# Altium PCB v2.0_with_IO_Expander.PcbDoc
Units mm, origin at the board's own origin, x right, y up, seen from the top; angles counter-clockwise.
Board outline 75 x 73.5 mm, 2 copper layers (Top Layer, Bottom Layer), stack 1.569 mm thick; 55 components, 44 nets, 201 pads, 33 vias.
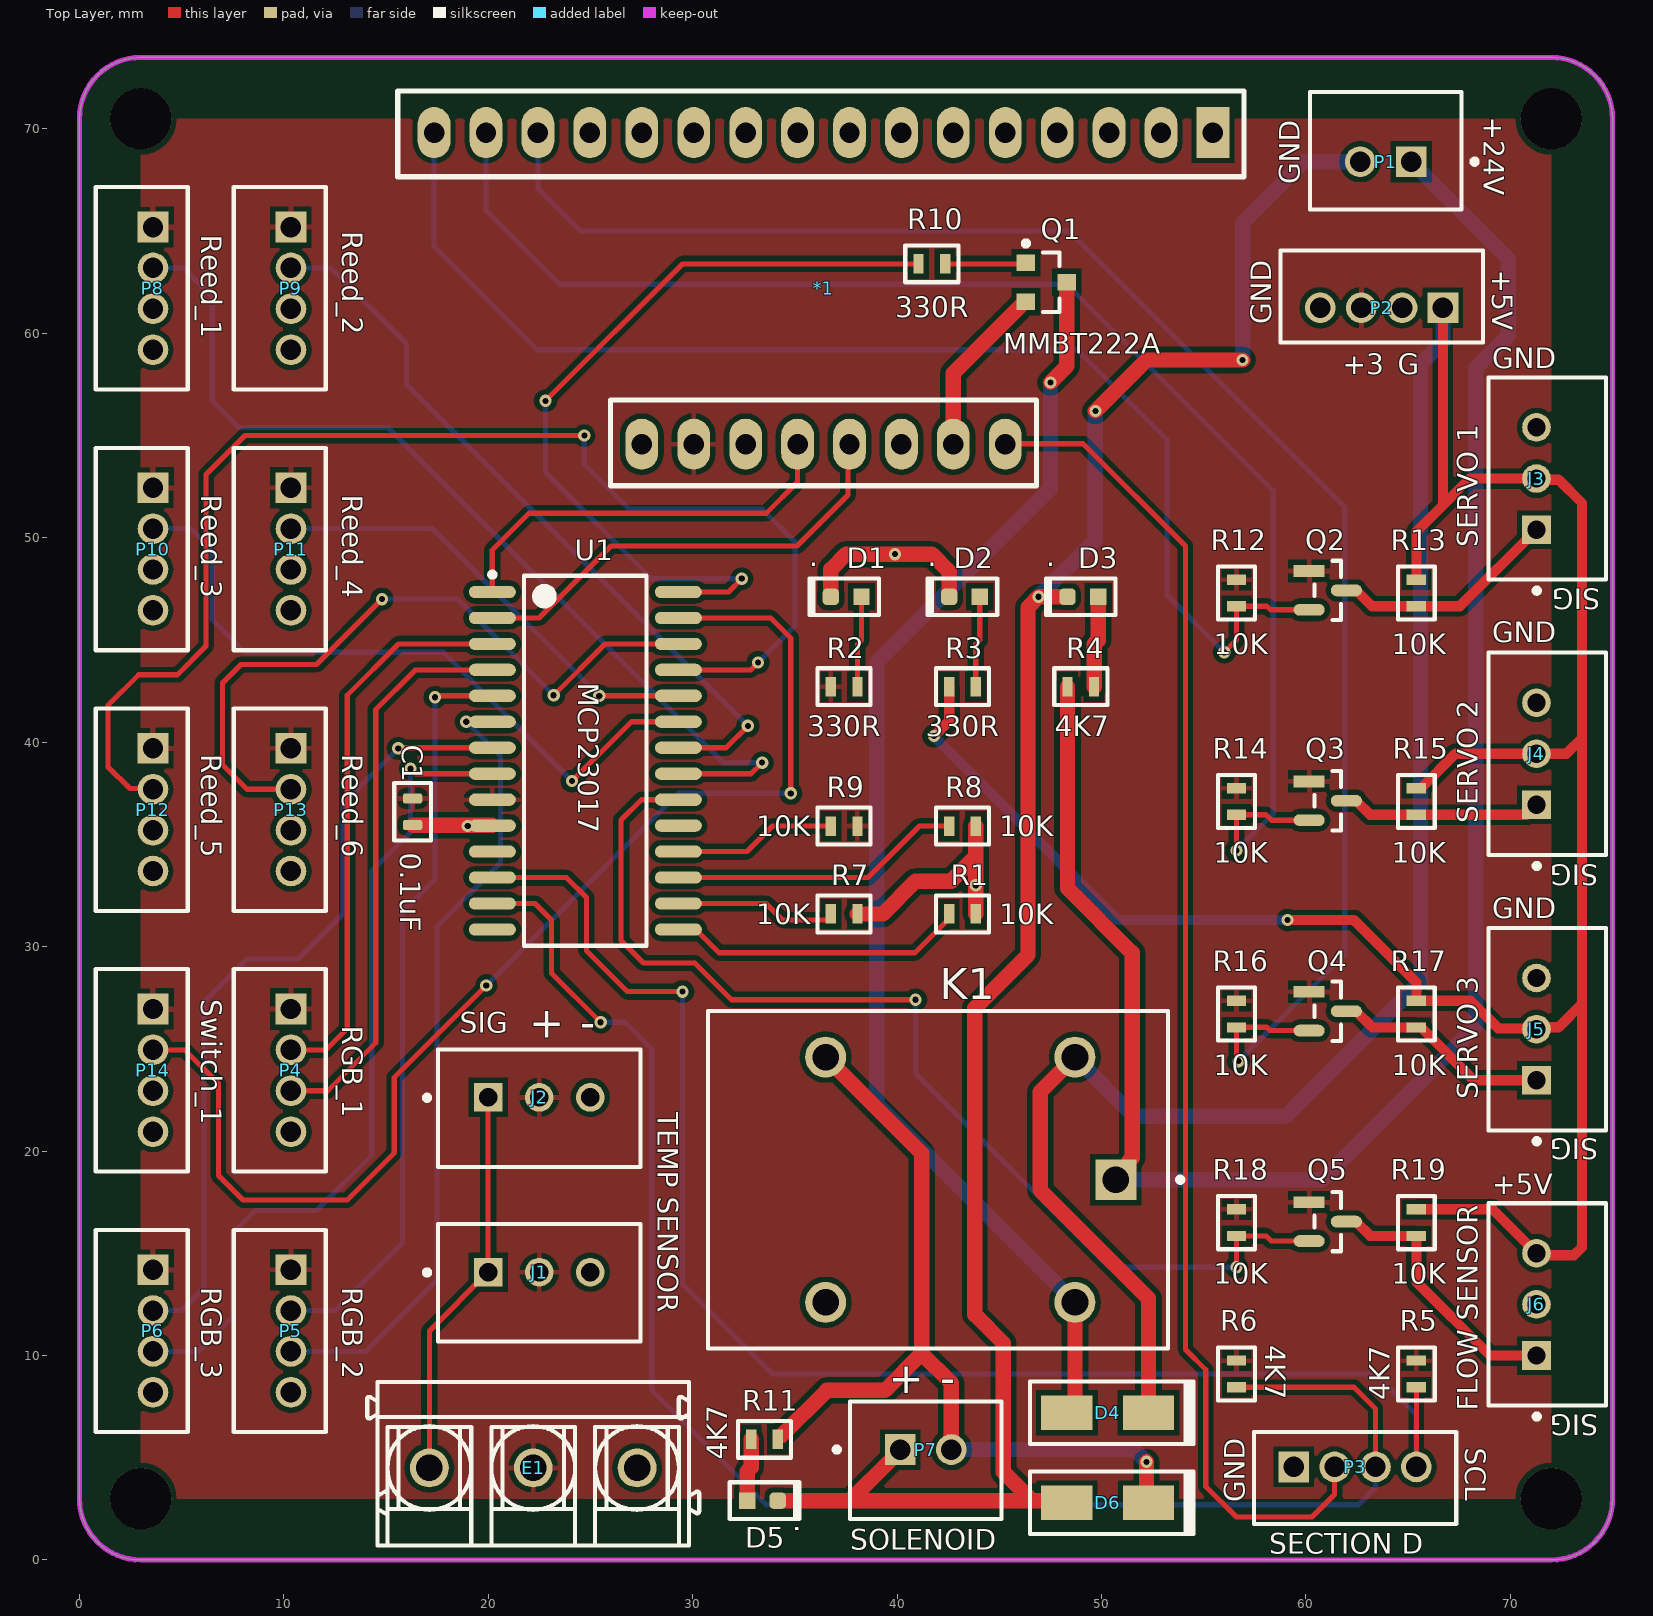
[diagram p0: Top Layer view]
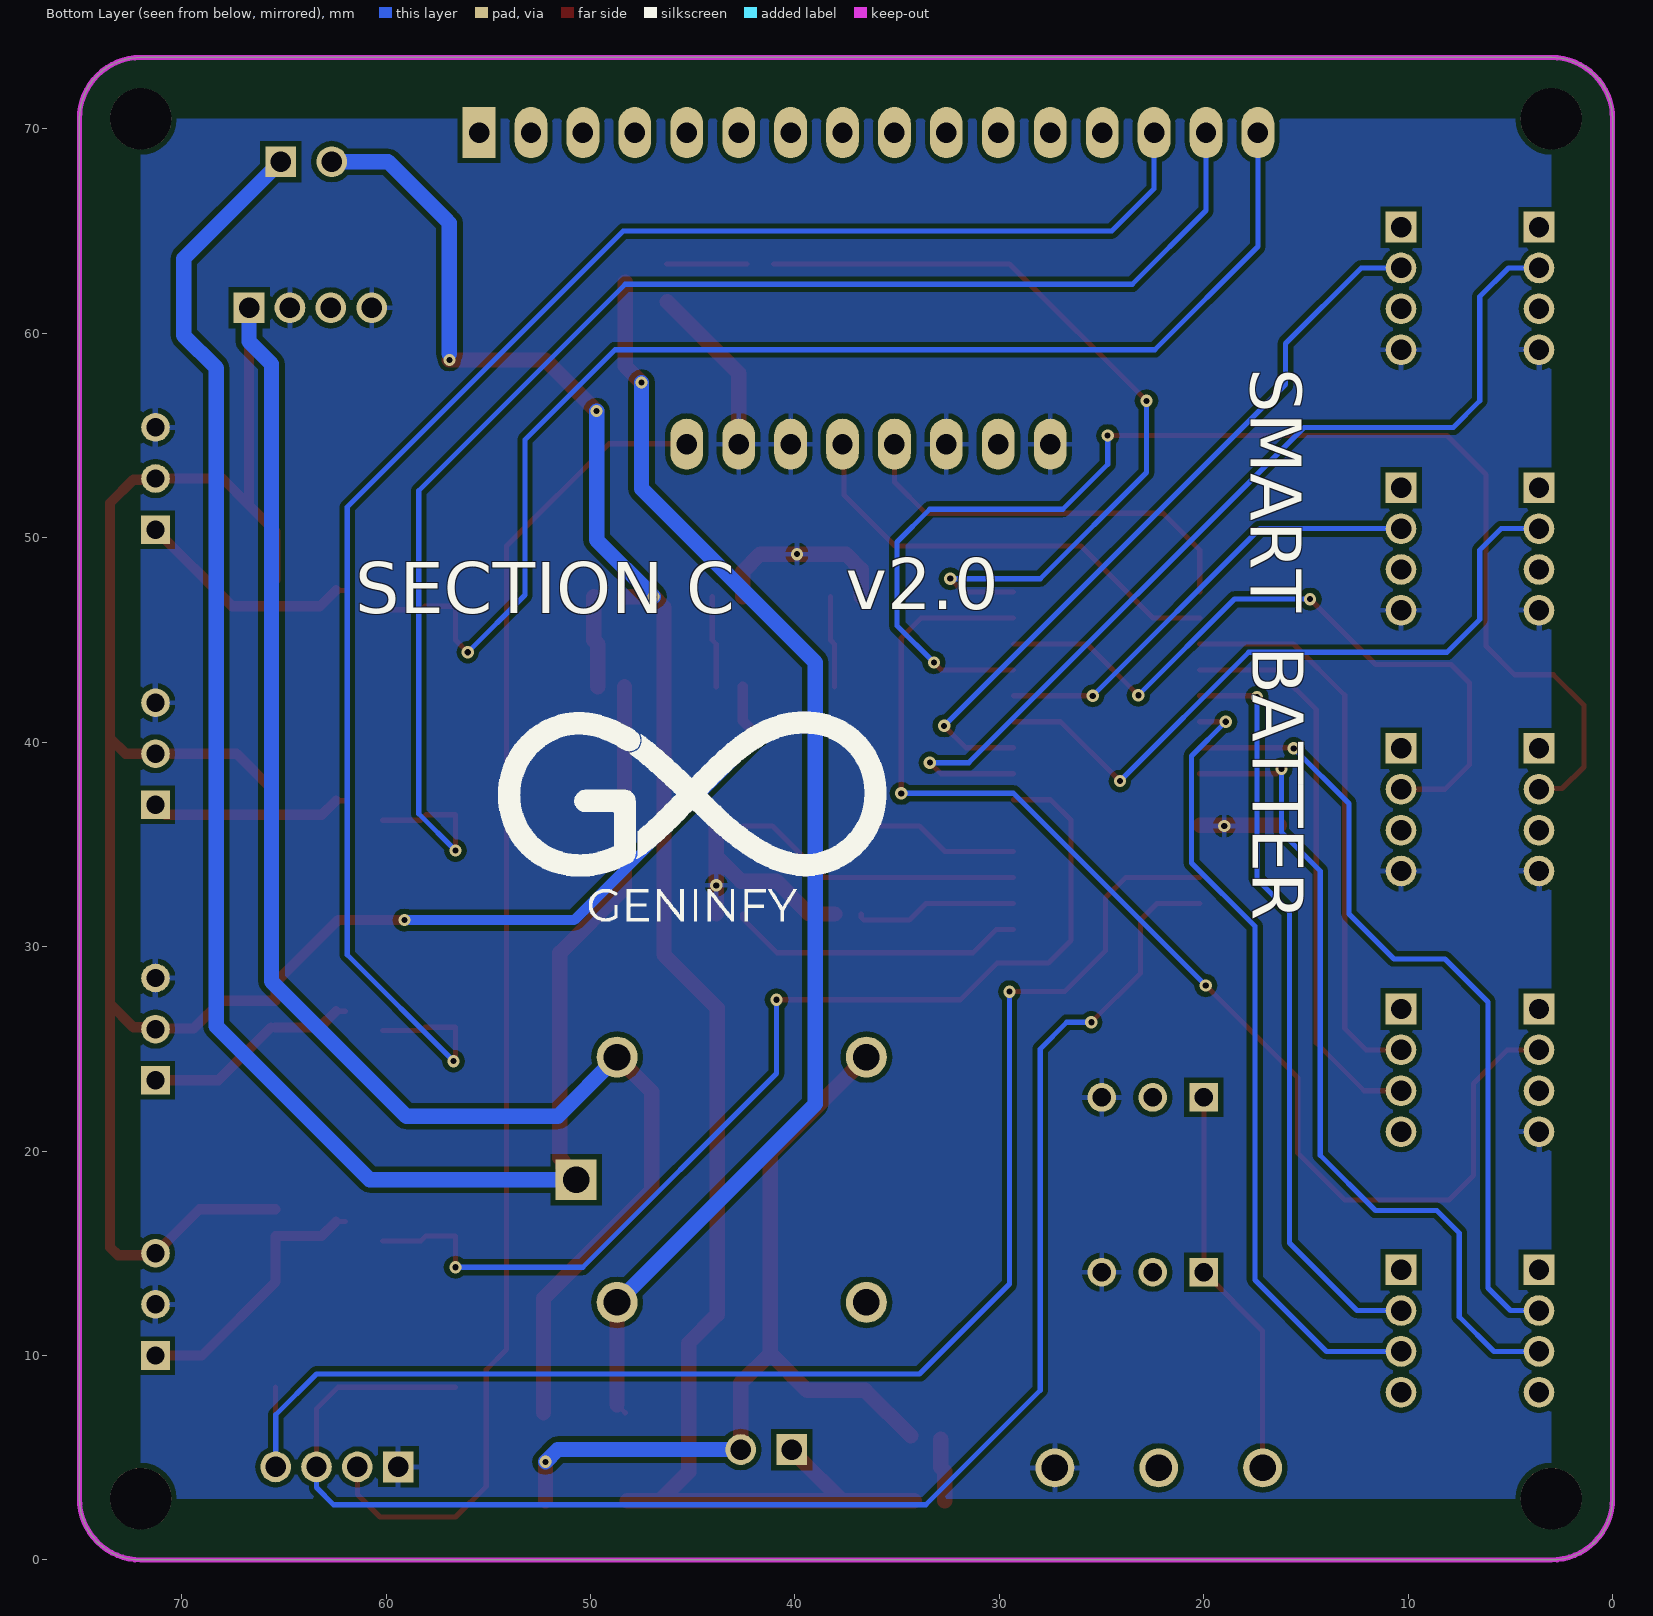
[diagram p1: Bottom Layer view, seen from below]
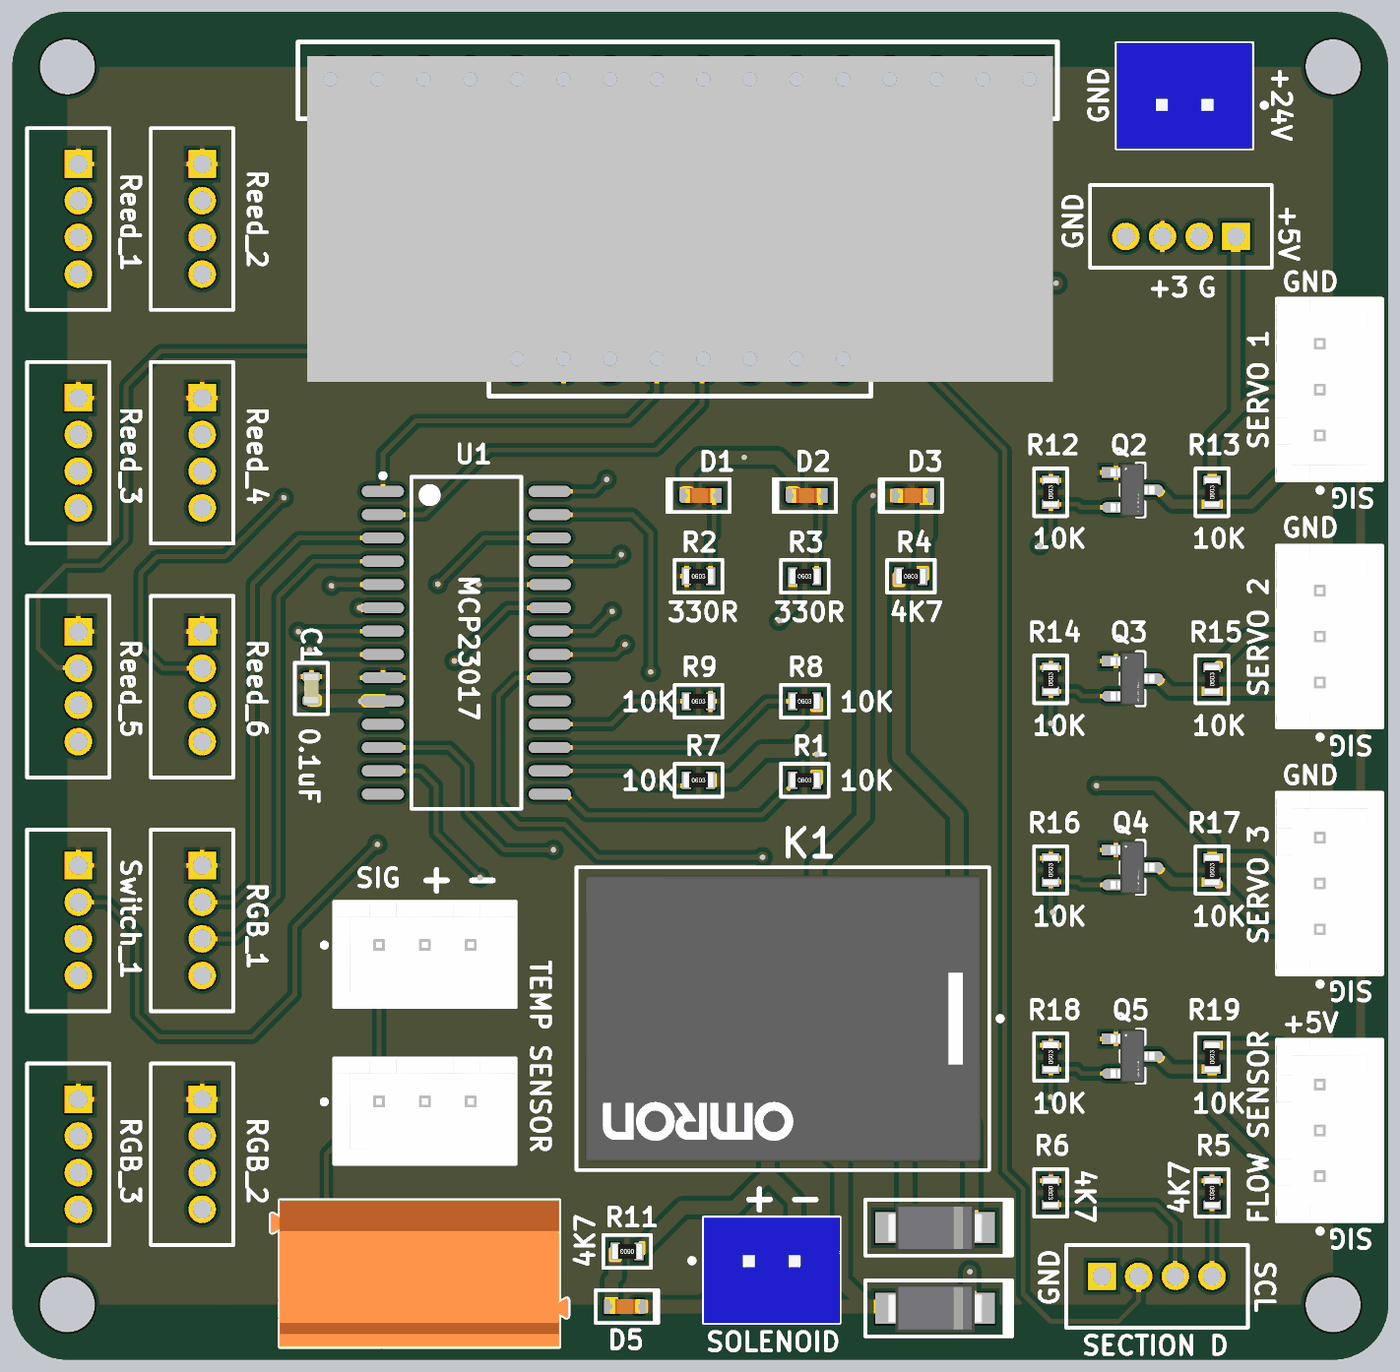
[diagram p2: 3D render of the assembled board from above, using the file's embedded part models]

## Layer stack, top to bottom
Top Solder: solder mask 0.0254, SM-001, Dk 4
Top Layer: signal copper 0.035
Dielectric 1: core 1.4986, Core-043, Dk 4.3
Bottom Layer: signal copper 0.035
Bottom Solder: solder mask 0.0254, SM-001, Dk 4

## Board outline
3,0 cw(c3,3) 0,3 0,70.5 cw(c3,70.5) 3,73.5 72,73.5 cw(c72,70.5) 75,70.5 75,3 cw(c72,3) 72,0

## Design rules (kind name [scope] priority, off if disabled: settings)
Clearance [All] p1: gap=0.254 ignorepadtopadclearanceinfootprint=FALSE except(0: Arc-Hole Track-Hole SMDPad-Hole THPad-Hole Via-Hole Fill-Hole Poly-Hole Region-Hole Text-Hole)
PolygonConnect [All] p1: connectstyle=Relief reliefconductorwidth=0.254 reliefentries=4 polygonreliefangle="90 Angle" airgapwidth=0.254
RoutingVias [All] p1: holewidth=0.711 width=1.27 viastyle="Through Hole" minholewidth=0.711 minwidth=1.27 maxholewidth=0.711 maxwidth=1.27
SolderMaskExpansion [All] p1: expansion=0.102 istentingtop=FALSE
Width [All] p1: maxlimit=1 minlimit=0.254 preferedwidth=0.254
30 further rules are at their usual default settings.

## Components (designator, comment, footprint, x,y, rotation, side; value= is the part's Value field where it differs from the comment)
*1 "CD74HC4067" "CD74HC4067 MODULE" 36.4,62.2 r270 top
C1 "0.1uF" "0.1uF 0603" 16.3,36.6 r270 top
D1 "LED - Orange" LED0603-Orange 37.507,47.118 r0 top
D2 "LED - Orange" LED0603-Orange 43.296,47.118 r0 top
D3 "LED - Orange" LED0603-Orange 49.086,47.118 r0 top
D4 "1N4007" "M7 1N4007 SMA" 50.3,7.2 r0 top
D5 "LED - Orange" LED0603-Orange 33.413,2.9 r180 top
D6 "1N4007" "M7 1N4007 SMA" 50.3,2.8 r0 top
E1 "1760500000" PM_5_08_90_03 22.2,4.7 r0 top
J1 "B3B-XH-A(LF)(SN)" FP-B3B-XH-A_LF_SN-MFG 22.492,13.553 r0 top
J2 "B3B-XH-A(LF)(SN)" FP-B3B-XH-A_LF_SN-MFG 22.492,22.1 r0 top
J3 "B3B-XH-A(LF)(SN)" FP-B3B-XH-A_LF_SN-MFG 71.8,52.9 r90 top
J4 "B3B-XH-A(LF)(SN)" FP-B3B-XH-A_LF_SN-MFG 71.8,39.433 r90 top
J5 "B3B-XH-A(LF)(SN)" FP-B3B-XH-A_LF_SN-MFG 71.8,25.967 r90 top
J6 "B3B-XH-A(LF)(SN)" FP-B3B-XH-A_LF_SN-MFG 71.8,12.5 r90 top
K1 "G5LE-14-DC5" FP-G5LE-14-DC5-MFG 42,18.6 r180 top
P1 "B2B-XH-A(LF)(SN)" JST-B2B-XH-A_V 63.9,68.4 r180 top
P2 "B4B-PH-K-S(LF)(SN)" JST-B4B-PH-K-S_V 63.7,61.8 r180 top
P3 "B4B-PH-K-S(LF)(SN)" JST-B4B-PH-K-S_V 62.4,4 r0 top
P4 "B4B-PH-K-S(LF)(SN)" JST-B4B-PH-K-S_V 9.8,23.95 r270 top
P5 "B4B-PH-K-S(LF)(SN)" JST-B4B-PH-K-S_V 9.8,11.2 r270 top
P6 "B4B-PH-K-S(LF)(SN)" JST-B4B-PH-K-S_V 3.05,11.2 r270 top
P7 "B2B-XH-A(LF)(SN)" JST-B2B-XH-A_V 41.4,5.4 r0 top
P8 "B4B-PH-K-S(LF)(SN)" JST-B4B-PH-K-S_V 3.05,62.2 r270 top
P9 "B4B-PH-K-S(LF)(SN)" JST-B4B-PH-K-S_V 9.8,62.2 r270 top
P10 "B4B-PH-K-S(LF)(SN)" JST-B4B-PH-K-S_V 3.05,49.45 r270 top
P11 "B4B-PH-K-S(LF)(SN)" JST-B4B-PH-K-S_V 9.8,49.45 r270 top
P12 "B4B-PH-K-S(LF)(SN)" JST-B4B-PH-K-S_V 3.05,36.7 r270 top
P13 "B4B-PH-K-S(LF)(SN)" JST-B4B-PH-K-S_V 9.8,36.7 r270 top
P14 "B4B-PH-K-S(LF)(SN)" JST-B4B-PH-K-S_V 3.05,23.95 r270 top
Q1 "MMBT2222ALT1G" ONSC-SOT-23-3-318-08_V 47.3,62.5 r0 top
Q2 "BSS138" FP-318-08-IPC_B 61.066,47.429 r0 top
Q3 "BSS138" FP-318-08-IPC_B 61.066,37.136 r0 top
Q4 "BSS138" FP-318-08-IPC_B 61.066,26.843 r0 top
Q5 "BSS138" FP-318-08-IPC_B 61.066,16.55 r0 top
R1 "10k" "10k R0603" 43.196,31.6 r0 top
R2 "68R" "68R 0603" 37.407,42.718 r0 top
R3 "68R" "68R 0603" 43.196,42.718 r0 top
R4 "68R" "68R 0603" 48.986,42.718 r0 top
R5 "10k" "10k R0603" 65.4,9.1 r270 top
R6 "10k" "10k R0603" 56.6,9.1 r270 top
R7 "10k" "10k R0603" 37.407,31.6 r0 top
R8 "10k" "10k R0603" 43.196,35.9 r0 top
R9 "10k" "10k R0603" 37.407,35.9 r0 top
R10 "68R" "68R 0603" 41.7,63.4 r180 top
R11 "68R" "68R 0603" 33.513,5.9 r180 top
R12 "10k" "10k R0603" 56.6,47.3 r90 top
R13 "10k" "10k R0603" 65.4,47.3 r90 top
R14 "10k" "10k R0603" 56.6,37.1 r90 top
R15 "10k" "10k R0603" 65.4,37.1 r90 top
R16 "10k" "10k R0603" 56.6,26.7 r90 top
R17 "10k" "10k R0603" 65.4,26.7 r90 top
R18 "10k" "10k R0603" 56.6,16.5 r90 top
R19 "10k" "10k R0603" 65.4,16.5 r90 top
U1 "MCP23017-E/SO" SOIC-SO28_N 24.75,39.095 r0 top

## Footprints (in the part's own frame and the unit in brackets; to place one, negate y for a bottom-side part, rotate by r counter-clockwise, add the part's x,y. Pads: shape width x height; smd on the part's side, far side on the other; paste and mask are expansions set on the pad)
"0.1uF 0603" [mm]
  rrect50% 0.5x0.95 smd: 1(-0.65,0) 2(0.65,0)
  silkscreen extent -1.4,-0.9 1.4,0.9, body extent -0.8,-0.4 0.8,0.4, height 0.8
"10k R0603" [mm]
  rect 0.5x0.95 smd: 1(-0.65,0) 2(0.65,0)
  silkscreen extent -1.3,-0.9 1.3,0.9, body extent -0.8,-0.4 0.8,0.4, height 0.45
"68R 0603" [mm]
  rect 0.5x0.95 smd: 1(-0.65,0) 2(0.65,0)
  silkscreen extent -1.3,-0.9 1.3,0.9, body extent -0.8,-0.4 0.8,0.4, height 0.45
"CD74HC4067 MODULE" [mm]
  oval 2.5x1.6 hole 1: C0(-7.62,-19.05) C1(-7.62,-16.51) C2(-7.62,-13.97) C3(-7.62,-11.43) C4(-7.62,-8.89) C5(-7.62,-6.35) C6(-7.62,-3.81) C7(-7.62,-1.27) C8(-7.62,1.27) C9(-7.62,3.81) C10(-7.62,6.35) C11(-7.62,8.89) C12(-7.62,11.43) C13(-7.62,13.97) C14(-7.62,16.51) EN(7.62,-3.81) GND(7.62,-8.89) S0(7.62,-1.27) S1(7.62,1.27) S2(7.62,3.81) S3(7.62,6.35) SIG(7.62,8.89) VCC(7.62,-6.35)
  rect 2.5x1.6 hole 1: C15(-7.62,19.05)
  silkscreen extent -9.65,-20.83 9.65,20.57, body extent -8.89,-20.32 8.89,20.32, height 11.35
FP-318-08-IPC_B [mm]
  rect 1.524x0.578 smd: 1(-0.91,0.95)
  rrect100% 1.524x0.578 smd: 2(-0.91,-0.95) 3(0.91,0)
  silkscreen extent -0.65,-1.45 0.65,1.45, body extent -1.92,-1.7 1.92,1.7, height 0.25
FP-B3B-XH-A_LF_SN-MFG [mm]
  rect 1.4x1.4 hole 0.9: 1(-2.5,0.525)
  round 1.4 hole 0.9: 2(0,0.525) 3(2.5,0.525)
  silkscreen extent -5.61,-2.88 4.95,2.88, body extent -5.05,-2.98 5.05,2.98, height 0.25
FP-G5LE-14-DC5-MFG [mm]
  rect 2x2 hole 1.3: 1(-8.7,0)
  round 2 hole 1.3: 2(-6.7,-6) 3(5.5,-6) 4(5.5,6) 5(-6.7,6)
  silkscreen extent -11.98,-8.25 11.25,8.25, body extent -11.35,-8.35 11.35,8.35, height 0.25
JST-B2B-XH-A_V [mm] "Header, 2-Leads, Body 7.4x5.75mm, Pitch 2.5mm"
  rect 1.5x1.5 hole 1: 1(-1.25,0)
  round 1.5 hole 1: 2(1.25,0)
  silkscreen extent -4.47,-3.4 3.7,2.35, body extent -3.7,-3.4 3.7,2.35, height 7
JST-B4B-PH-K-S_V [mm] "Connector, 4-Leads, Body 9.9x4.5mm, Pitch 2mm"
  rect 1.5x1.5 hole 1: 1(-3,0.55)
  round 1.5 hole 1: 2(-1,0.55) 3(1,0.55) 4(3,0.55)
  silkscreen extent -4.95,-2.25 4.95,2.25, body extent -4.95,-2.25 4.95,2.25, height 6
LED0603-Orange [mm]
  rrect50% 0.8x0.8 smd: 1(-0.75,0)
  rect 0.8x0.8 smd: 2(0.75,0)
  silkscreen extent -1.8,-0.9 1.6,1, body extent -0.8,-0.4 0.8,0.4, height 0.7
"M7 1N4007 SMA" [mm]
  rect 2.5x1.7 smd: 1(-2,0) 2(2,0)
  silkscreen extent -3.8,-1.6 4.2,1.52, body extent -2.6,-1.3 2.6,1.3, height 2.42
ONSC-SOT-23-3-318-08_V [mm] "SOT23, 3-Leads, Body 2.92x1.3mm, Pitch 0.95mm"
  rect 0.9x0.8 smd: 1(-1,0.95) 2(-1,-0.95) 3(1,0)
  silkscreen extent -1.12,-1.46 0.65,2.02, body extent -0.65,-1.46 0.65,1.46, height 1.11
PM_5_08_90_03 [mm] "PM 5.08/03/90 3.5"
  round 1.9 hole 1.3: A1(-5.08,-0.2) A2(0,-0.2) A3(5.08,-0.2)
  silkscreen extent -8.12,-4 8.12,4, body extent -8.12,-4 8.12,4, height 10.01
SOIC-SO28_N [mm] "SOIC, 28-Leads, Body 17.9x7.5mm, Pitch 1.27mm, IPC Medium Density"
  oval 2.3x0.6 smd: 1(-4.55,8.255) 2(-4.55,6.985) 3(-4.55,5.715) 4(-4.55,4.445) 5(-4.55,3.175) 6(-4.55,1.905) 7(-4.55,0.635) 8(-4.55,-0.635) 9(-4.55,-1.905) 10(-4.55,-3.175) 11(-4.55,-4.445) 12(-4.55,-5.715) 13(-4.55,-6.985) 14(-4.55,-8.255) 15(4.55,-8.255) 16(4.55,-6.985) 17(4.55,-5.715) 18(4.55,-4.445) 19(4.55,-3.175) 20(4.55,-1.905) 21(4.55,-0.635) 22(4.55,0.635) 23(4.55,1.905) 24(4.55,3.175) 25(4.55,4.445) 26(4.55,5.715) 27(4.55,6.985) 28(4.55,8.255)
  silkscreen extent -4.67,-9.05 3,9.23, body extent -3.8,-9.05 3.8,9.05, height 2.65

## Part data
C1: library part C0603C104M4RACTU, "CAP CER 0.1UF 16V X7R 0603", Capacitance=100nF, Case Code (Imperial)=0603, Case Code (Metric)=1608, Dielectric=X7R, Dielectric Material=Ceramic, Manufacturer=KEMET, Max Operating Temperature=125°C, Min Operating Temperature=-55°C, Package Quantity=1, Supplier Part Number 1=399-1099-1-ND, Tolerance=20%, Voltage Rating=16V, Case/Package=0603, Category="Ceramic Capacitors", ComponentLink1Description=https://datasheet.ciiva.com/18102/getdatasheetpartid-66190-18102310.pdf?src-supplier=Verical, ComponentLink1URL=https://datasheet.ciiva.com/18102/getdatasheetpartid-66190-18102310.pdf?src-supplier=Verical, ComponentLink2Description=https://datasheet.ciiva.com/7823/kem-c1002-x7r-smd-7823992.pdf?src-supplier=Element14, ComponentLink2URL=https://datasheet.ciiva.com/7823/kem-c1002-x7r-smd-7823992.pdf?src-supplier=Element14, ComponentLink3Description=https://datasheet.ciiva.com/7823/kem-c1002-x7r-smd-7823993.pdf?src-supplier=Element14, ComponentLink3URL=https://datasheet.ciiva.com/7823/kem-c1002-x7r-smd-7823993.pdf?src-supplier=Element14, ComponentLink4Description=https://datasheet.ciiva.com/14589/70095383-14589450.pdf?src-supplier=Allied+Electronics, ComponentLink4URL=https://datasheet.ciiva.com/14589/70095383-14589450.pdf?src-supplier=Allied+Electronics, ComponentLink5Description=https://datasheet.ciiva.com/18192/getdatasheetpartid-302288-18192716.pdf?src-supplier=Verical, ComponentLink5URL=https://datasheet.ciiva.com/18192/getdatasheetpartid-302288-18192716.pdf?src-supplier=Verical, Depth=0.8mm, Height=0.8mm, Lead Pitch=0.7mm, Length=1.6mm, Manufacturer Part Number=C0603C104M4RACTU, Mount="Surface Mount,PCB", Number of Pins=2, Packaging="Tape and Reel", Pricing 1="1=0.10000, 10=0.03100, 50=0.01720, 100=0.01400, 500=0.01002, 1000=0.00787 (USD)", Radiation Hardening=No, REACH SVHC="No SVHC", RoHS=Yes, Stock 1=114153, Supplier 1=Digi-Key, Termination=SMD/SMT, Thickness=0.034inch, Voltage Rating (DC)=16V, Width=0.031inch
D1 D2 D3 D5: library part LTST-C191KFKT, "LED ORANGE CLEAR SMD", Case Code (Imperial)=0603, Case Code (Metric)=1608, Color=Orange, Forward Current=30mA, Forward Voltage=2V, Lens Color=Colorless, Manufacturer="Vishay Lite-On", Max Operating Temperature=85°C, Min Operating Temperature=-55°C, Package Quantity=1, Power Dissipation=75mW, Reverse Voltage=5V, Supplier Part Number 1=160-1445-1-ND, Test Current=20mA, Case/Package=0603, Category=LEDs, ComponentLink1Description=https://datasheet.ciiva.com/2109/ltst-c191kfkt-2109968.pdf?src-supplier=Digi-Key, ComponentLink1URL=https://datasheet.ciiva.com/2109/ltst-c191kfkt-2109968.pdf?src-supplier=Digi-Key, ComponentLink2Description=https://datasheet.ciiva.com/12400/100-ltst-c191kfkt-39904-12400811.pdf?src-supplier=Mouser, ComponentLink2URL=https://datasheet.ciiva.com/12400/100-ltst-c191kfkt-39904-12400811.pdf?src-supplier=Mouser, ComponentLink3Description=https://datasheet.ciiva.com/11775/0900766b80dc02b0-11775613.pdf?src-supplier=RSComponents, ComponentLink3URL=https://datasheet.ciiva.com/11775/0900766b80dc02b0-11775613.pdf?src-supplier=RSComponents, ComponentLink4Description=https://datasheet.ciiva.com/15201/getdatasheetpartid-631075-15201391.pdf?src-supplier=Verical, ComponentLink4URL=https://datasheet.ciiva.com/15201/getdatasheetpartid-631075-15201391.pdf?src-supplier=Verical, ComponentLink5Description=https://datasheet.ciiva.com/2109/s-110-ltst-c191kfkt-2109969.pdf?src-supplier=Digi-Key, ComponentLink5URL=https://datasheet.ciiva.com/2109/s-110-ltst-c191kfkt-2109969.pdf?src-supplier=Digi-Key, Depth=0.8mm, Dominant Wavelength=605nm, Height=0.55mm, Illumination Color=Orange, Lead Free="Lead Free", Length=1.6mm, Lens Style=Diffused,Colorless,Rectangular, Lens Transparency=Clear, Luminous Intensity=90mcd, Manufacturer Part Number=LTST-C191KFKT, Mount="Surface Mount", Number of Elements=1, Number of LEDs=1, Number of Pins=2, Packaging="Tape and Reel", Power Rating=75mW, Pricing 1="1=0.24000, 10=0.17900, 100=0.08460, 500=0.05640, 1000=0.04418, 2500=0.04324 (USD)", Radiation Hardening=No, RoHS=Yes, Stock 1=92562, Supplier 1=Digi-Key, Viewing Angle=130°, Wavelength=611nm, Width=0.8mm
D4 D6: library part 1N4007FLTR, "1000V 1A Rectifier", Manufacturer="Sangdest Microelectronics", Supplier Part Number 1=1655-1N4007FLCT-ND, Manufacturer Part Number=1N4007FLTR, Pricing 1="1=0.10000, 10=0.06600, 100=0.03120, 500=0.01848, 1000=0.01241 (USD)", RoHS=No, Stock 1=2517, Supplier 1=Digi-Key
E1: library part CMP-1559-01629-1, "OMNIMATE Signal - series PM", Colour=Orange, Manufacturer=Weidmueller, Rated_current_use_group_B_UL_1059="15 A", Rated_voltage_for_surge_voltage_class_pollution_degree_II_2="600 V", Rated_voltage_use_group_B_UL_1059="300 V", UL_94_flammability_rating=V-0, ComponentLink1Description="Manufacturer URL", ComponentLink1URL=http://www.weidmueller.com/, ComponentLink2Description="URL Link1", ComponentLink2URL=http://catalog.weidmueller.com/catalog/Start.do?localeId=en&ObjectID=1760500000, Contact_material=Cu-Leg, Contact_surface=tinned, Insulating_material="Wemid (PA)", Mounting_onto_the_PCB="Solder connection", No_of_poles=3, PackageReference=PM_5_08_90_03, Packaging=Box, PartNumber=1760500000, Pitch_inch="0,2 inch", Pitch_mm="5,08 mm", Qty="500 PCS", Revision=V1, Short_text_for_material="PM 5.08/03/90 3.5SN OR BX", Side_termination_characteristic="closed side", Solder_pin_length_mm="3,5 mm", Solid_max_H05_07_V_U="2,5 mm²", Solid_min_H05_07_V_U="0,13 mm²", Wire_cross_section_AWG_max_UL_1059="AWG 14", Wire_cross_section_AWG_min_UL_1059="AWG 26"
J1 J2 J3 J4 J5 J6: library part CMP-17439-000014-1, "CONN HEADER VERT 3POS 2.5MM", Current Rating=3A, Manufacturer=JST, Package=0, Temperature="-25°C to +85°C", Temperature Range High=+85°C, Temperature Range Low=-25°C, Voltage Rating=250V, Automotive=No, Category=Conn, ComponentLink2Description=Datasheet, ComponentLink2URL=https://www.jst-mfg.com/product/pdf/eng/eXH.pdf, Conn Gender=Male, Conn Orientation=Vertical, Contact Material=Tin,Copper, Device Class L1=Connectors, Device Class L2="Headers and Wire Housings", Device Class L3=unset, Digikey Description="CONN HEADER VERT 3POS 2.5MM", Height=7mm, Lead Free=Yes, Manufacturer Part Number=B3B-XH-A(LF)(SN), Number of Contacts=3, Number Of Rows=1, Octopart=https://octopart.com/b3b-xh-a%28lf%29%28sn%29-jst-3990185, Pitch=2.5mm, RoHS=TRUE
K1: library part CMP-08822-000008-1, "RELAY GEN PURPOSE SPDT 10A 5V", Ambient Temperature Range High=+85°C, Ambient Temperature Range Low=-25°C, Coil Current=79.4mA, Coil Power=400mW, Coil Resistance=63Ω, Coil Voltage=5V, Current Rating=10A, Manufacturer=Omron, Package=0, Temperature="-25°C to +85°C", Automotive=No, Category=Relay, Coil Type=Non-Latching, ComponentLink2Description=Datasheet, ComponentLink2URL=https://omronfs.omron.com/en_US/ecb/products/pdf/en-g5le.pdf, Device Class L1=Electromechanical, Device Class L2=Relays, Device Class L3="Power Relays", Digikey Description="RELAY GEN PURPOSE SPDT 10A 5V", Height=19mm, Lead Free=Yes, Manufacturer Part Number=G5LE-14-DC5, Mouser Description="General Purpose Relays Power PCB Relay SPDT Sealed 5VDC", Number of Contacts=1, Octopart=https://octopart.com/g5le-14-dc5-omron-28829, RoHS=TRUE, Standoff Height=0.5mm, Switching Current=10A, Temperature Range High=+85°C, Temperature Range Low=-25°C, Throw Configuration=SPDT
P1 P7: library part CMP-2000-05888-1, "Male Header, Pitch 2.5 mm, 1 x 2 Position, Height 7 mm, Tail Length 3.4 mm, -25 to 85 degC, RoHS, Bulk", Manufacturer=JST, Package Description="Male Header, Pitch 2.5 mm, 1 x 2 Position, Height 7 mm, Tail Length 3.4 mm", Package Reference=B2B-XH-A, Datasheet URL=http://www.jst-mfg.com/product/pdf/eng/eXH.pdf, Datasheet Version=05/2016, Manufacturer URL=http://www.jst.com/home2.html, Mounting Technology=ThroughHole, No of Positions=2, Pitch=2.5mm, Style/Orientation=StraightHeader/Plug, Termination=Crimp, Type=ShroudedHeader
P2 P3 P4 P5 P6 P8 P9 P10 P11 P12 P13 P14: library part CMP-2000-05165-1, "Male Header, Pitch 2 mm, 1 x 4 Position, Height 6 mm, Tail Length 3.4 mm, -25 to 85 degC, RoHS, Bulk", Manufacturer=JST, Datasheet URL=http://datasheet.octopart.com/B4B-PH-K-S%28LF%29%28SN%29-JST-datasheet-10558886.pdf, Datasheet Version=Apr-09, Manufacturer URL=http://www.jst.com/home2.html, No of Positions=4, Pitch=2mm, Style/Orientation=StraightHeader/Plug, Termination=Crimp, Type=ShroudedHeader
Q1: library part CMP-1048-00538-1, "General Purpose Transistor, NPN Silicon, 3-Pin SOT-23, Pb-Free, Tape and Reel", Manufacturer="On Semiconductor", ComponentLink1Description="Manufacturer URL", ComponentLink1URL=http://www.onsemi.com/, ComponentLink2Description=Datasheet, ComponentLink2URL=http://www.onsemi.cn/pub_link/Collateral/MMBT2222LT1-D.PDF, ComponentLink3Description="Package Specification", ComponentLink3URL=http://www.onsemi.cn/pub_link/Collateral/318-08.PDF, DatasheetVersion="Rev. 10", fT Min (MHz)=300, IC Continuous (A)=0.6, Mounting Technology="Surface Mount", PackageDescription="3-Pin Small Outline Transistor, Body 2.92 x 1.3 mm, Pitch 0.95 mm", PackageReference=SOT-23-3-318-08, PackageVersion="Rev. AP, 11/2009", Packing="Tape and Reel", PartNumber=MMBT2222ALT1G, Polarity=NPN, RoHS=TRUE
Q2 Q3 Q4 Q5: library part CMP-07173-000101-1, "MOSFET N-CH 50V 220MA SOT-23", Case/Package=SOT-23, Continuous Drain Current (ID)=220mA, Drain to Source Breakdown Voltage=50V, Drain to Source Resistance=3.5R, Gate to Source Voltage (Vgs)=20V, Input Capacitance=27pF, Max Operating Temperature=150°C, Max Power Dissipation=360mW, Min Operating Temperature=-55°C, On-State Resistance=6R, Package Quantity=1, Threshold Voltage=1.3V, Contact Plating=Tin, Current Rating=220mA, Drain to Source Voltage (Vdss)=50V, Dual Supply Voltage=50V, Element Configuration=Single, Fall Time=9ns, Height=0.93mm, Lead Free="Lead Free", Length=2.92mm, Mount="Surface Mount", Nominal Vgs=1.3V, Number of Elements=1, Number of Pins=3, Packaging="Tape and Reel", Power Dissipation=360mW, Radiation Hardening=No, Rds On Max=3.5R, REACH SVHC="No SVHC", Rise Time=9ns, Termination=SMD/SMT, Turn-Off Delay Time=20ns, Turn-On Delay Time=2.5ns, Voltage Rating (DC)=50V, Weight=0.03g, Width=1.3mm
R1 R5 R6 R7 R8 R9 R12 R13 R14 R15 R16 R17 R18 R19: library part CRG0603F10K/10, "RES 10.0K OHM 1/10W 1% 0603", Case Code (Imperial)=0603, Manufacturer="TE Connectivity", Max Operating Temperature=125°C, Max Power Dissipation=100mW, Min Operating Temperature=-55°C, Number of Resistors=1, Package Quantity=10000, Resistance=10kR, Resistor Type="Thick Film", Supplier Part Number 1=A121523CT-ND, Temperature Coefficient=100ppm/°C, Tolerance=1%, Voltage Rating=50V, Case/Package=0603, Category="Chip SMD Resistors", ComponentLink1Description=https://datasheet.ciiva.com/2530/eng-cd-1622829-ba-2530062.pdf?src-supplier=Digi-Key, ComponentLink1URL=https://datasheet.ciiva.com/2530/eng-cd-1622829-ba-2530062.pdf?src-supplier=Digi-Key, Depth=0.8mm, ELV=Compliant, Height=0.022inch, Length=1.6mm, Manufacturer Part Number=CRG0603F10K/10, Military Standard=Not, Mount="Surface Mount", Number of Terminations=2, Packaging="Tape and Reel", Power Rating=100mW, Pricing 1="1=0.10000, 10=0.03100, 100=0.01270, 1000=0.00570, 2500=0.00494, 5000=0.00409 (USD)", Radiation Hardening=No, RoHS=Yes, Stock 1=172089, Supplier 1=Digi-Key, Termination=Solder, Weight=7.1E-05oz, Width=0.8mm
R2 R3 R4 R10 R11: library part CRGP0603F68R, "CRGP 0603 68R 1%", Case Code (Imperial)=0603, Case Code (Metric)=1608, Manufacturer="TE Connectivity", Max Operating Temperature=155°C, Max Power Dissipation=250mW, Min Operating Temperature=-55°C, Resistor Type="Thick Film", Supplier Part Number 1=A130402CT-ND, Temperature Coefficient=200ppm/°C, Tolerance=1%, Case/Package=0603, Category="Chip SMD Resistors", ComponentLink1Description=https://www.te.com/commerce/DocumentDelivery/DDEController?Action=srchrtrv&amp;DocNm=9-1773463-9&amp;DocType=DS&amp;DocLang=English&src-supplier=Digi-Key, ComponentLink1URL=https://www.te.com/commerce/DocumentDelivery/DDEController?Action=srchrtrv&amp;DocNm=9-1773463-9&amp;DocType=DS&amp;DocLang=English&src-supplier=Digi-Key, Manufacturer Part Number=CRGP0603F68R, Number of Terminations=2, Packaging="Tape and Reel", Pricing 1="1=0.14000, 10=0.11400, 100=0.04470, 1000=0.01870, 2500=0.01714 (USD)", Resistance=68R, RoHS=No, Stock 1=49308, Supplier 1=Digi-Key
U1: library part CMP-0186-00161-2, "16-Bit I/O Expander with Serial Interface, 28-Pin SOIC, Extended Temperature", Code_JEDEC=MS-013, ComponentLink1Description="Manufacturer URL", ComponentLink1URL=http://www.microchip.com/, ComponentLink2Description=Datasheet, ComponentLink2URL=http://ww1.microchip.com/downloads/en/DeviceDoc/21952b.pdf, ComponentLink3Description="Package Specification", ComponentLink3URL=http://www.microchip.com/stellent/groups/techpub_sg/documents/packagingspec/en012702.pdf, DatasheetVersion="revB, Feb-2007", PackageDescription="28-Lead Plastic Small Outline (SO) - Wide 7.50mm Body [SOIC]", PackageReference=SOIC-SO28, PackageVersion="revBB, Aug-2009", RevisionNote="URLs added."

## Free pads (board coordinates)
  round 3 hole 3 unplated: ""(3,3) ""(3,70.5) ""(72,3) ""(72,70.5)

## Via types
v1: diameter 0.6, hole 0.3, Top Layer to Bottom Layer, tented both sides, 33 vias

## Nets (pads, with @x,y where several pads share a name; then routed paths per layer and width w, separated by ;. In a path a pad name is that pad's centre, name@x,y a point inside that pad or via, vN(x,y) a via of type N, cw(c..) or ccw(c..) an arc to the next point about the centre after c; other vN are vias at no path point)
+3V3: *1.VCC C1.1 E1.A2 J1.2 J2.2 P2.3 P4.1 P5.1 P6.1 P8.1 P9.1 P10.1 P11.1 P12.1 P13.1 P14.1 Q2.1 Q3.1 Q4.1 Q5.1 R2.1 R5.1 R6.1 R9.2 R12.2 R14.2 R16.2 R18.2 U1.9
+5V: D4.2 J3.2 J4.2 J5.2 J6.3 K1.2 P2.1 R3.1 R13.2 R15.2 R17.2 R19.2 | length 192.3
  Top Layer w0.254: R15.2 R15.2@65.625,37.75 ; J5.2@71.242,26 J5.2 J5.2@71.364,26.056 ; J6.3 J6.3@71.375,14.9 ; J3.2 J3.2@71.331,52.844
  Top Layer w0.5: v1(41.8,40.3) 42.546,41.046 R3.1 ; v1(59.1,31.3) 62.355,31.3 65.4,28.255 R17.2 68.05,27.35 69.4,26 J5.2@71.242,26 ; R19.2 69.125,17.15 J6.3 ; R13.2 65.4,50.3 66.7,51.6 ; R15.2@65.625,37.75 67.308,39.433 J4.2 72.733,39.433 73.5,40.2 ; P2.1 66.7,51.6 ; J3.2 68,52.9 66.7,51.6 ; J3.2@71.331,52.844 72.356,52.844 73.5,51.7 73.5,40.2 ; J5.2@71.364,26.056 72.356,26.056 73.5,27.2 ; J6.3@71.375,14.9 73.1,14.9 73.5,15.3 73.5,27.2 ; 73.5,27.2 73.5,40.2
  Top Layer w0.75: K1.2 47,22.9 47,18.1 52.3,12.8 D4.2
  Bottom Layer w0.5: v1(41.8,40.3) 50.8,31.3 v1(59.1,31.3)
  Bottom Layer w0.75: K1.2 51.6,21.7 59,21.7 65.6,28.3 65.6,58.5 66.7,59.6 P2.1
+24V: K1.1 P1.1 R4.1 | length 91.4
  Top Layer w0.75: R4.1 48.336,32.864 51.5,29.7 51.5,19.664 51.325,19.489 51.325,19.225 K1.1
  Bottom Layer w0.75: K1.1 60.8,18.6 68.3,26.1 68.3,58.3 69.9,59.9 69.9,63.65 P1.1
BLUE_1: P4.3 U1.4 | length 27.9
  Top Layer w0.254: P4.3 12.15,22.95 14.5,25.3 14.5,41.6 16.44,43.54 U1.4
BLUE_2: P5.3 U1.6 | length 39.2
  Top Layer w0.254: v1(18.923,41) U1.6
  Bottom Layer w0.254: P5.3 14,10.2 17.5,13.7 17.5,31 20.6,34.1 20.6,39.323 v1(18.923,41)
BLUE_3: P6.3 U1.8 | length 40.9
  Top Layer w0.254: v1(16.2,38.7) 16.44,38.46 U1.8
  Bottom Layer w0.254: P6.3 5.8,10.2 7.5,11.9 7.5,16 8.6,17.1 11.6,17.1 14.3,19.8 14.3,33.7 16.2,35.6 v1(16.2,38.7)
EXTRA_1: P14.2 U1.27 | length 60.8
  Top Layer w0.254: P14.2 5.15,24.95 6.8,23.3 6.8,18.8 8,17.6 13.1,17.6 15.4,19.9 15.4,23.6 v1(19.9,28.1) ; U1.27 33.82,46.08 34.8,45.1 v1(34.8,37.5)
  Bottom Layer w0.254: v1(19.9,28.1) 29.3,37.5 v1(34.8,37.5)
FLOW: Q5.2 R18.1 U1.20 | length 53.1
  Top Layer w0.254: U1.20 27.49,37.19 26.5,36.2 26.5,30.3 27.6,29.2 30.1,29.2 31.9,27.4 v1(40.9,27.4) ; v1(56.6,14.319) R18.1 58.054,15.85 58.304,15.6 Q5.2
  Bottom Layer w0.254: v1(40.9,27.4) 40.9,23.8 50.381,14.319 v1(56.6,14.319)
GND: *1.EN *1.GND *1.S2 *1.S3 C1.2 D1.1 D2.1 E1.A3 J1.3 J2.3 J3.3 J4.3 J5.3 J6.2 P2.2 P2.4 P3.1 P8.4 P9.4 P10.4 P11.4 P12.4 P13.4 P14.4 Q1.2 R1.2 R7.2 R8.2 U1.10 | length 32.7
  Top Layer w0.254: C1.2 C1.2@16.315,35.935 ; U1.10@20.185,35.935 U1.10 ; Q1.2@46.25,61.55 Q1.2
  Top Layer w0.75: C1.2@16.315,35.935 U1.10@20.185,35.935 ; D1.1 36.757,48.457 37.5,49.2 41.7,49.2 42.546,48.354 D2.1 ; R7.2 39.3,31.6 40.9,33.2 42.646,33.2 43.846,34.4 ; *1.S3 42.75,58.05 Q1.2@46.25,61.55 ; R1.2 43.846,34.4 ; R8.2 43.846,34.4
  other v1: 43.846,33 19,35.9 39.9,49.2
NetD1_2: D1.2 R2.2 | length 4.5
  Top Layer w0.254: R2.2 38.057,44.794 38.257,44.994 D1.2
NetD2_2: D2.2 R3.2 | length 4.5
  Top Layer w0.254: R3.2 43.846,44.794 44.046,44.994 D2.2
NetD3_2: D3.2 R4.2 | length 4.5
  Top Layer w0.75: R4.2 49.636,44.794 49.836,44.994 D3.2
NetD4_1: D4.1 K1.5 Q1.3 | length 63.3
  Top Layer w0.254: D4.1 D4.1@48.7,7.6
  Top Layer w0.75: v1(47.5,57.6) 48.3,58.4 Q1.3 ; D4.1@48.7,7.6 K1.5
  Bottom Layer w0.75: v1(47.5,57.6) 47.5,52.4 39,43.9 39,22.3 K1.5
NetD5_2: D5.2 R11.2 | length 3.1
  Top Layer w0.75: D5.2 32.663,4.324 32.863,4.524 R11.2
NetD6_2: D6.2 K1.3 P7.2 R11.1 | length 42.1
  Top Layer w0.254: D6.2@52.2,2.9 D6.2
  Top Layer w0.75: R11.1@34.331,6.069 36.563,8.3 39.4,8.3 41.2,10.1 ; K1.3 41.2,19.9 41.2,10.1 ; P7.2 42.65,8.65 41.2,10.1 ; D6.2@52.2,2.9 v1(52.2,4.8)
  Bottom Layer w0.75: P7.2 51.6,5.4 v1(52.2,4.8)
NetJ3_1: J3.1 Q2.3 R13.1 | length 11.2
  Top Layer w0.254: Q2.3 Q2.3@62.449,47.429
  Top Layer w0.5: Q2.3@62.449,47.429 63.228,46.65 R13.1 67.525,46.65 J3.1
NetJ4_1: J4.1 Q3.3 R15.1 | length 9.8
  Top Layer w0.254: Q3.3 Q3.3@62.449,37.136 ; J4.1@70.792,36.45 J4.1
  Top Layer w0.5: Q3.3@62.449,37.136 63.135,36.45 R15.1 J4.1@70.792,36.45
NetJ5_1: J5.1 Q4.3 R17.1 | length 10.7
  Top Layer w0.254: Q4.3 Q4.3@62.449,26.843 ; R17.1 R17.1@65.625,26.05
  Top Layer w0.5: Q4.3@62.449,26.843 63.242,26.05 R17.1 ; R17.1@65.625,26.05 68.208,23.467 J5.1
NetJ6_1: J6.1 Q5.3 R19.1 | length 13.3
  Top Layer w0.254: Q5.3 Q5.3@62.449,16.55
  Top Layer w0.5: Q5.3@62.449,16.55 63.149,15.85 R19.1 65.4,13.6 69,10 J6.1
NetQ1_1: Q1.1 R10.1 | length 3.9
  Top Layer w0.254: R10.1 Q1.1@46.27,63.4
NetR1_1: R1.1 U1.15 | length 14.6
  Top Layer w0.254: U1.15 30.15,30.84 31.29,29.7 40.871,29.7 42.546,31.375 R1.1
NetR7_1: R7.1 U1.16 | length 8
  Top Layer w0.254: U1.16 33.59,32.11 34.4,31.3 36.634,31.3 36.757,31.423 R7.1
NetR8_1: R8.1 U1.17 | length 14.3
  Top Layer w0.254: U1.17 38.58,33.38 41.1,35.9 R8.1
NetR9_1: R9.1 U1.18 | length 8
  Top Layer w0.254: U1.18 32.65,34.65 33.9,35.9 R9.1
PGND: D3.1 D5.1 D6.1 P1.2 P7.1 | length 97.9
  Top Layer w0.254: D6.1@48.2,2.9 D6.1
  Top Layer w0.75: D5.1 37.7,2.9 ; P7.1 39.775,5.025 39.775,4.975 37.7,2.9 ; D6.1@48.2,2.9 46.6,2.9 ; D3.1 v1(46.918,47.118) 46.4,46.6 46.4,29.6 43.8,27 43.8,12 45.2,10.6 45.2,4.3 46.6,2.9 ; v1(49.7,56.2) 52.2,58.7 v1(56.9,58.7) ; 37.7,2.9 46.6,2.9
  Bottom Layer w0.254: v1(56.9,58.7) 56.9,59 ; 56.9,65.4 57,65.5
  Bottom Layer w0.75: v1(46.918,47.118) 49.7,49.9 v1(49.7,56.2) ; 56.9,59 56.9,65.4 ; 57,65.5 59.9,68.4 P1.2
RED_1: P4.2 U1.3 | length 27.6
  Top Layer w0.254: P4.2 12.05,24.95 13.1,26 13.1,42.3 15.61,44.81 U1.3
RED_2: P5.2 U1.5 | length 37
  Top Layer w0.254: v1(17.4,42.2) 17.47,42.27 U1.5
  Bottom Layer w0.254: P5.2 12.5,12.2 15.8,15.5 15.8,31.7 17.4,33.3 v1(17.4,42.2)
RED_3: P6.2 U1.7 | length 39.4
  Top Layer w0.254: v1(15.6,39.7) 15.63,39.73 U1.7
  Bottom Layer w0.254: P6.2 5,12.2 6.1,13.3 6.1,27.3 8.2,29.4 10.7,29.4 12.9,31.6 12.9,37 v1(15.6,39.7)
S0: *1.S0 U1.1 | length 20.2
  Top Layer w0.254: U1.1 20.2,49.4 22,51.2 33.6,51.2 35.13,52.73 *1.S0
S1: *1.S1 U1.2 | length 22.4
  Top Layer w0.254: U1.2 22.48,46.08 26,49.6 35.1,49.6 37.6,52.1 37.6,54.51 *1.S1
SCL: P3.4 R5.2 U1.12 | length 72.4
  Top Layer w0.254: U1.12 23.82,33.38 24.8,32.4 24.8,29.8 26.8,27.8 v1(29.5,27.8) ; P3.4 R5.2
  Bottom Layer w0.254: v1(29.5,27.8) 29.5,13.5 33.9,9.1 63.4,9.1 65.397,7.103 65.397,4.553 P3.4
SDA: P3.3 R6.2 U1.13 | length 78.1
  Top Layer w0.254: U1.13 22.29,32.11 23.1,31.3 23.1,28.7 v1(25.5,26.3) ; R6.2 62.35,8.45 63.4,7.4 P3.3
  Bottom Layer w0.254: v1(25.5,26.3) 26.7,26.3 28,25 28,8.3 33.6,2.7 62.563,2.7 63.4,3.537 P3.3
SERVO_1: *1.C0 Q2.2 R12.1 | length 63
  Top Layer w0.254: v1(56,44.4) 56.6,45 R12.1 58.094,46.65 58.265,46.479 Q2.2
  Bottom Layer w0.254: *1.C0 17.35,64.25 22.4,59.2 48.8,59.2 53.2,54.8 53.2,47.2 v1(56,44.4)
SERVO_2: *1.C1 Q3.2 R14.1 | length 71.8
  Top Layer w0.254: v1(56.6,34.7) R14.1 58.047,36.45 58.311,36.186 Q3.2
  Bottom Layer w0.254: *1.C1 19.89,66.01 23.5,62.4 48.3,62.4 58.4,52.3 58.4,36.5 v1(56.6,34.7)
SERVO_3: *1.C2 Q4.2 R16.1 | length 83.2
  Top Layer w0.254: v1(56.7,24.4) 56.7,24.494 56.6,24.594 R16.1 56.606,26.056 58.098,26.056 58.254,25.9 60.149,25.9 Q4.2
  Bottom Layer w0.254: *1.C2 22.43,67.07 24.5,65 48.4,65 61.9,51.5 61.9,29.6 v1(56.7,24.4)
SERVO_IN: *1.SIG P3.2 | length 66
  Top Layer w0.254: *1.SIG 45.31,54.6 49.1,54.6 54.1,49.6 54.1,10.3 55.1,9.3 55.1,3.6 56.6,2.1 60.3,2.1 61.4,3.2 P3.2
SOLENOID: R10.2 U1.28 | length 39.6
  Top Layer w0.254: v1(22.8,56.7) 29.5,63.4 R10.2 ; U1.28 31.75,47.35 v1(32.4,48)
  Bottom Layer w0.254: v1(22.8,56.7) 22.8,53.2 28,48 v1(32.4,48)
SWITCH_1: P8.2 U1.21 | length 47.1
  Top Layer w0.254: U1.21 32.86,38.46 v1(33.4,39)
  Bottom Layer w0.254: P8.2 5.1,63.2 6.5,61.8 6.5,56.7 7.8,55.4 15.1,55.4 31.5,39 v1(33.4,39)
SWITCH_2: P9.2 U1.22 | length 36.6
  Top Layer w0.254: U1.22 31.63,39.73 v1(32.7,40.8)
  Bottom Layer w0.254: P9.2 12.3,63.2 16,59.5 16,57.5 v1(32.7,40.8)
SWITCH_3: P10.2 U1.23 | length 34
  Top Layer w0.254: v1(24.1,38.1) 27,41 U1.23
  Bottom Layer w0.254: P10.2 5.45,50.45 6.5,49.4 6.5,46 8.1,44.4 17.8,44.4 v1(24.1,38.1)
SWITCH_4: P11.2 U1.24 | length 22.3
  Top Layer w0.254: v1(25.43,42.27) U1.24
  Bottom Layer w0.254: P11.2 17.25,50.45 v1(25.43,42.27)
SWITCH_5: P12.2 U1.25 | length 63.3
  Top Layer w0.254: P12.2 3.569,37.731 2.469,37.731 1.405,38.795 1.405,41.805 2.9,43.3 4.8,43.3 6.2,44.7 6.2,53.1 8.1,55 v1(24.7,55) ; U1.25 32.84,43.54 v1(33.2,43.9)
  Bottom Layer w0.254: v1(24.7,55) 24.7,53.6 26.9,51.4 33.4,51.4 35,49.8 35,45.7 v1(33.2,43.9)
SWITCH_6: P13.2 U1.26 | length 34.8
  Top Layer w0.254: P13.2 8.2,37.7 7,38.9 7,42.9 7.9,43.8 11.6,43.8 v1(14.8,47) ; v1(23.2,42.3) 25.71,44.81 U1.26
  Bottom Layer w0.254: v1(14.8,47) 18.5,47 v1(23.2,42.3)
TEMP: E1.A1 J1.1 J2.1 | length 19.3
  Top Layer w0.254: E1.A1 17.12,11.206 J1.1 J2.1
pads on no net: *1.C3 *1.C4 *1.C5 *1.C6 *1.C7 *1.C8 *1.C9 *1.C10 *1.C11 *1.C12 *1.C13 *1.C14 *1.C15 K1.4 P4.4 P5.4 P6.4 P8.3 P9.3 P10.3 P11.3 P12.3 P13.3 P14.3 U1.11 U1.14 U1.19

## Polygon pours and split planes (outlines as drawn)
+3V3 on Top Layer "+3V3_L01_P000" (solid, pour order 0): 3,70.5 72,70.5 72,3 3,3
GND on Bottom Layer "GND_L02_P001" (solid, pour order 1): 3,70.5 72,70.5 72,3 3,3

## Keep-outs
Keep-Out Layer:
  the board outline again, w0.254

## Silkscreen, mask and mechanical layers (free items; w line width, h text height)
Top Overlay:
  text "+24V" at 68.7,70.6 h1 r270
  text "GND" at 59.7,67.3 h1 r90
  text "Reed_2" at 12.867,65 h1 r270
  text "Reed_1" at 5.967,64.833 h1 r270
  text "+5V" at 69.1,63.1 h1 r270
  text "330R" at 39.9,60.8 h1
  text "GND" at 58.3,60.434 h1 r90
  text "MMBT222A" at 45.2,59 h1
  text "GND" at 69.1,58.3 h1
  text "+3" at 61.8,58 h1
  text "G" at 64.5,58 h1
  text "Reed_3" at 5.967,52.1 h1 r270
  text "Reed_4" at 12.867,52.1 h1 r270
  text "SERVO 1" at 68.4,49.533 h1 r90
  text "." at 35.7,48.6 h1
  text "." at 41.5,48.6 h1
  text "." at 47.3,48.6 h1
  text "SIG" at 74.4,47.5 h1 r180
  text "GND" at 69.1,44.9 h1
  text "10K" at 55.5,44.3 h1
  text "10K" at 64.2,44.3 h1
  text "MCP23017" at 24.4,42.9 h1 r270
  text "330R" at 35.6,40.3 h1
  text "330R" at 41.4,40.3 h1
  text "4K7" at 47.7,40.3 h1
  text "Reed_5" at 5.967,39.4 h1 r270
  text "Reed_6" at 12.867,39.4 h1 r270
  text "SERVO 2" at 68.4,36.033 h1 r90
  text "10K" at 33.1,35.4 h1
  text "10K" at 45,35.4 h1
  text "0.1uF" at 15.7,34.6 h1 r270
  text "10K" at 55.5,34.1 h1
  text "10K" at 64.2,34.1 h1
  text "SIG" at 74.3,34 h1 r180
  text "GND" at 69.1,31.4 h1
  text "10K" at 33.1,31.1 h1
  text "10K" at 45,31.1 h1
  text "Switch_1" at 5.967,27.433 h1 r270
  text "RGB_1" at 12.867,26.133 h1 r270
  text "SIG" at 18.6,25.8 h1
  text "+" at 22,25.55 h1.5
  text "-" at 24.5,25.55 h1.5
  text "10K" at 55.5,23.7 h1
  text "10K" at 64.2,23.7 h1
  text "SERVO 3" at 68.4,22.533 h1 r90
  text "TEMP SENSOR" at 28.3,21.9 h1 r270
  text "SIG" at 74.3,20.6 h1 r180
  text "+5V" at 69.1,17.9 h1
  text "10K" at 55.5,13.5 h1
  text "10K" at 64.2,13.5 h1
  text "RGB_3" at 5.967,13.333 h1 r270
  text "RGB_2" at 12.867,13.333 h1 r270
  text "4K7" at 58,10.5 h1 r270
  text "+" at 39.6,8.15 h1.5
  text "-" at 42.1,8.15 h1.5
  text "4K7" at 64.1,7.8 h1 r90
  text "FLOW SENSOR" at 68.4,7.3 h1 r90
  text "SIG" at 74.3,7.1 h1 r180
  text "SCL" at 67.8,5.5 h1 r270
  text "4K7" at 31.7,4.9 h1 r90
  text "GND" at 57,2.834 h1 r90
  text "." at 35.2,1.3 h1 r90
  text "SOLENOID" at 37.7,0.5 h1
  text "SECTION D" at 58.2,0.3 h1
Bottom Overlay:
  drawing of 9 lines, arcs and shapes, not listed
  text "SMART" at 17.7,58.3 h2.5 r90
  text "v2.0" at 37.5,46.5 h2.5
  text "SECTION C" at 61.5,46.3 h2.5
  text "BATTER" at 17.6,44.7 h2.5 r90